# EAGLE board A3DL (2) (EAGLE 9.6.2)
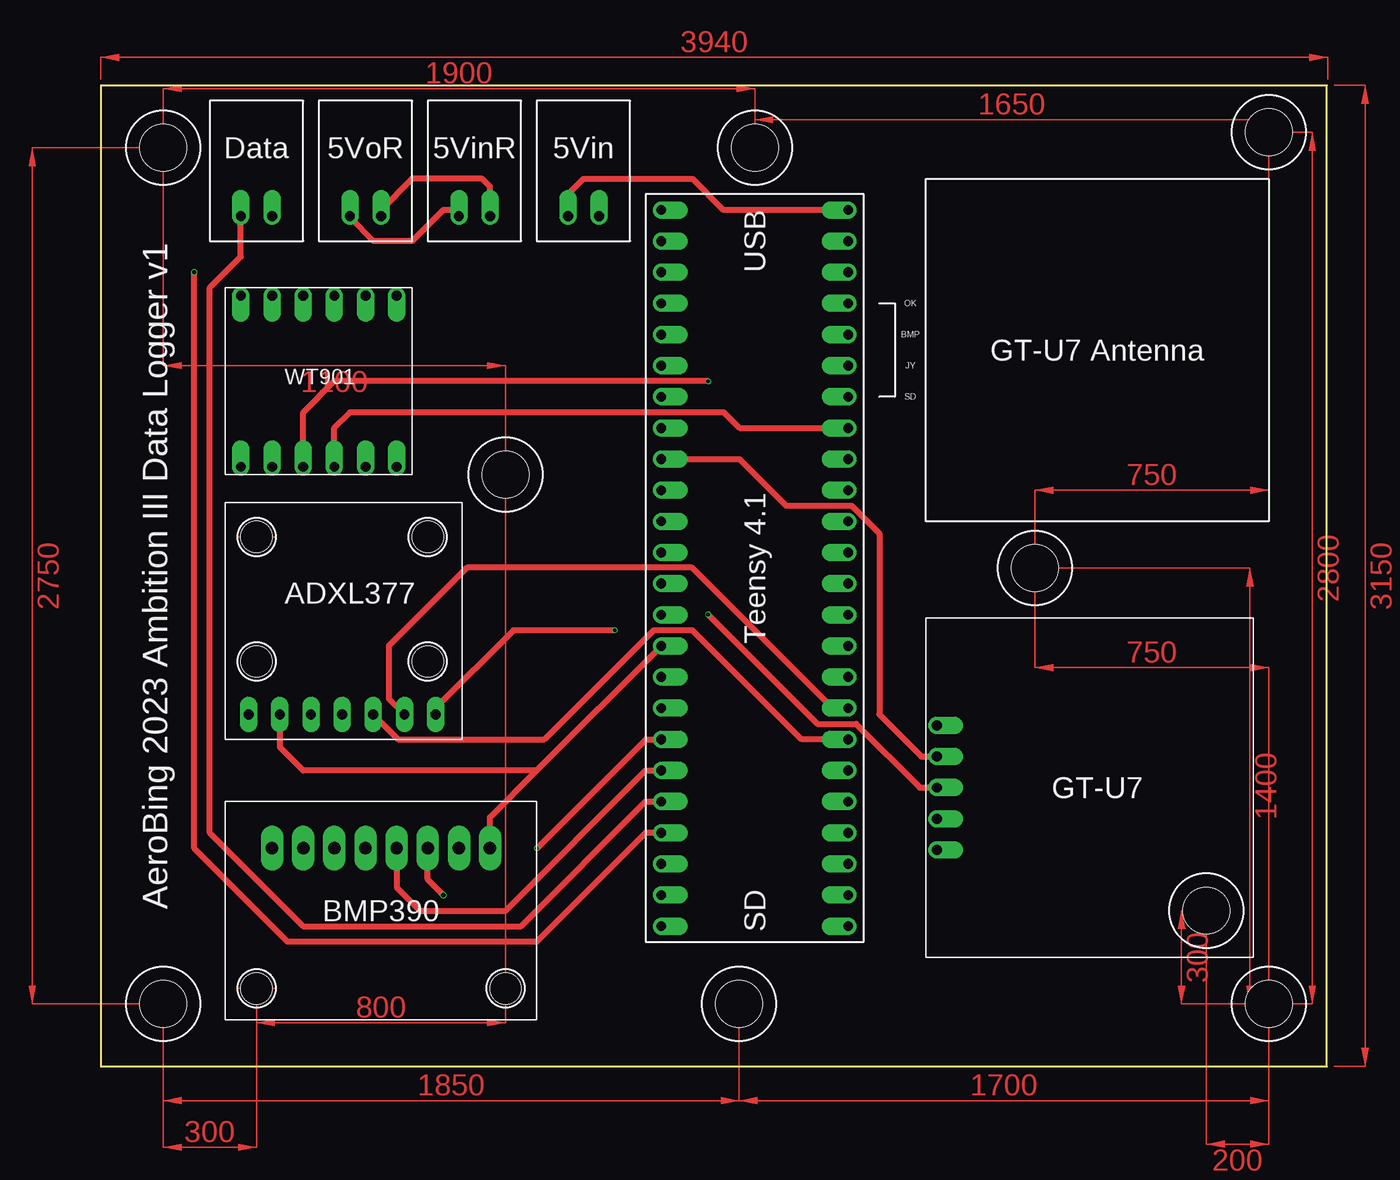
[diagram p0: board, top side]
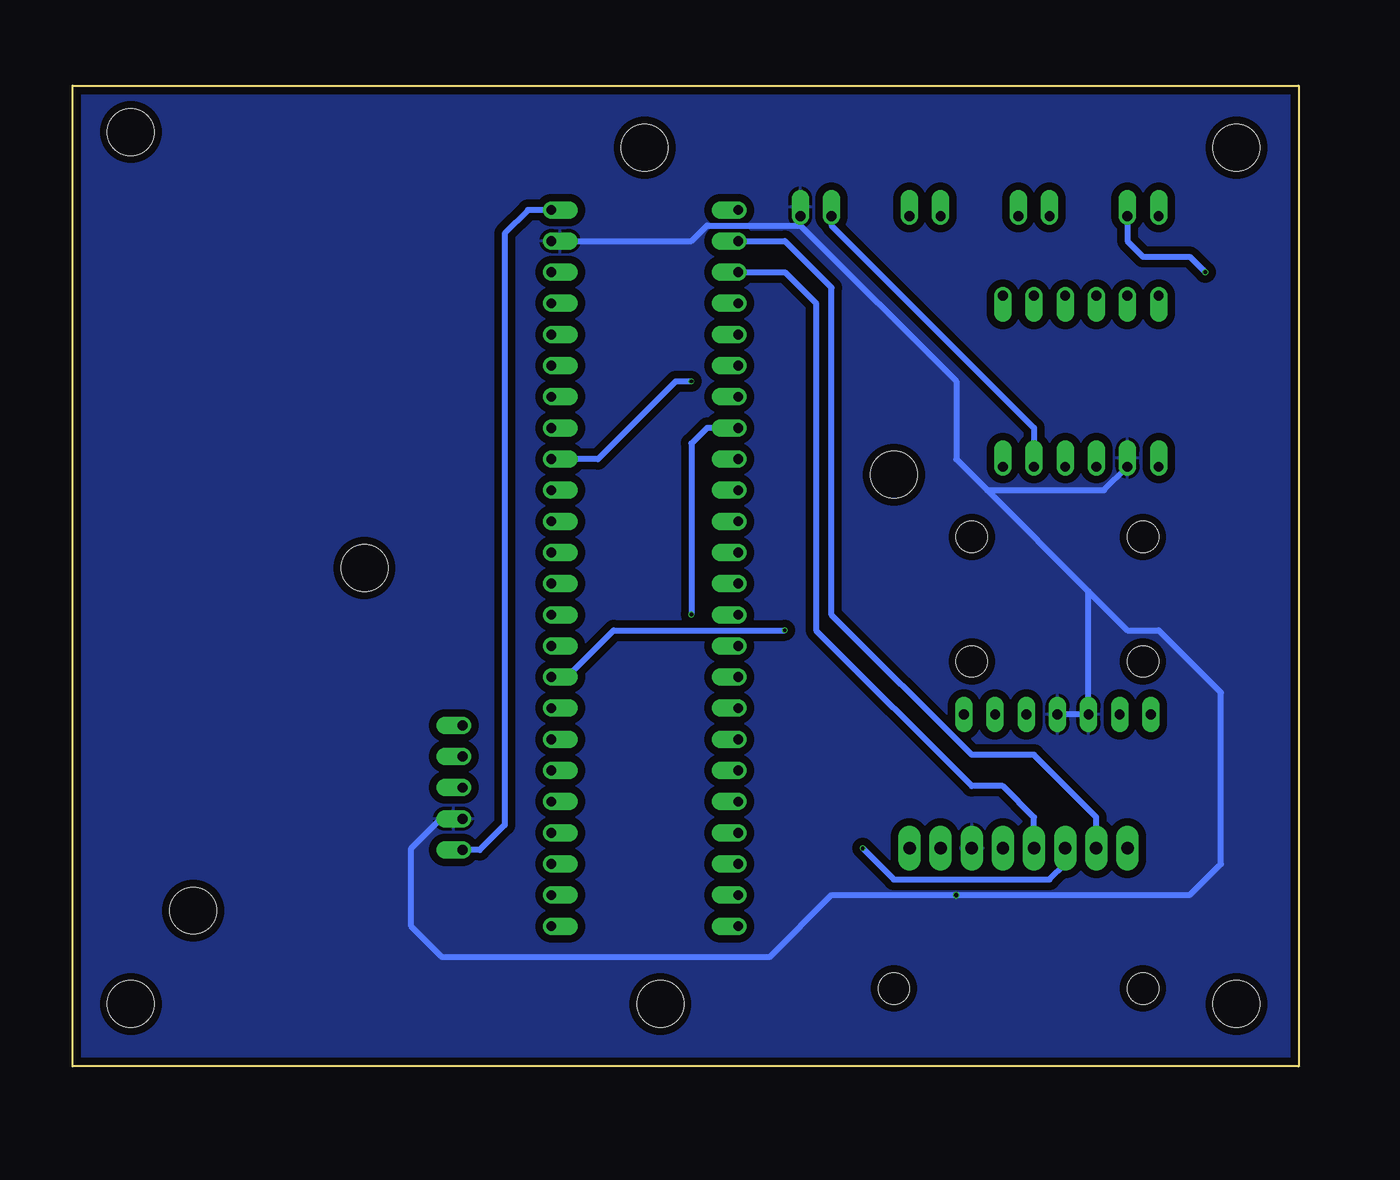
[diagram p1: board, bottom side, seen from below]

Size 100 x 80 mm. Coordinates in mm from the lower left corner, seen from the top.
Outline: 0,0 100,0 100,80 0,80 0,0
Copper layers (1*16): Top 0.035mm / dielectric 1.6mm / Bottom 0.035mm
Design rules "JLPCB-TwoLayer *": minimum track width 20mil, minimum drill 0.3mm, track to track 5mil, track to pad 5mil, pad to pad 5mil, via to via 5mil, smd to smd 5mil, copper to edge 0.2mm, drill to drill 6mil, minimum pad ring 10mil, minimum via ring 3mil, stop-mask expansion 4mil, vias tented up to drill 0mil, thermal gap 10mil
Holes 3.81 mm at 5.08,74.93 5.08,5.08 95.25,76.2 95.25,5.08 33.02,48.26 52.07,5.08 76.2,40.64 53.34,74.93

## Footprints (pad centres in the part's own frame; a part is rotated, then mirrored left to right if it is on the bottom)
ADXL377 = drill 0.8 long: 3V 4.445,2.032; GND 6.985,2.032; T 9.525,2.032; VIN 1.905,2.032; X 17.145,2.032; Y 14.605,2.032; Z 12.065,2.032 | hole 2.54: 2.54,16.51; 16.51,16.51; 16.51,6.35; 2.54,6.35
GT-U7 = drill 0.8 pad 1.27 offset: GND 11.303,25.781; RX 13.843,25.781; TX 16.383,25.781; U 18.923,25.781; VCC 8.763,25.781 | hole 3.81: 3.81,3.81
CUSTOM_RADIO_INTERFACE = drill 0.8 offset: 5V 5.08,9.398; GND 2.54,9.398; RX 13.97,9.398; TX 11.43,9.398
WT901 = drill 0.8 offset: D0 13.97,14.605; D1 1.27,14.605; D2 13.97,0.635; D3 1.27,0.635; GND1 3.81,14.605; GND2 3.81,0.635; RX 8.89,14.605; SCL 8.89,0.635; SDA 6.35,0.635; TX 6.35,14.605; VCC1 11.43,14.605; VCC2 11.43,0.635
BMP390 = drill 1.016 long: 3V0 6.35,3.81; CS 19.05,3.81; GND 8.89,3.81; INT 21.59,3.81; SCL 11.43,3.81; SDA 16.51,3.81; SDC 13.97,3.81; VIN 3.81,3.81 | hole 2.54: 2.54,15.24; 22.86,15.24
CUSTOM_POWER_INPUT = drill 0.8 offset: 5V 5.08,9.398; GND 2.54,9.398; RFD_5V 13.97,9.398; RFD_GND 11.43,9.398
CUSTOM_TEENSY4.1 = drill 0.8 offset: 0 3.81,1.27; 1 6.35,1.27; 2 8.89,1.27; 3 11.43,1.27; 3VA 36.83,1.27; 3VB 6.35,16.51; 4 13.97,1.27; 5 16.51,1.27; 5VA 1.27,16.51; 6 19.05,1.27; 7 21.59,1.27; 8 24.13,1.27; 9 26.67,1.27; 10 29.21,1.27; 11 31.75,1.27; 12 34.29,1.27; 13 34.29,16.51; 14 31.75,16.51; 15 29.21,16.51; 16 26.67,16.51; 17 24.13,16.51; 18 21.59,16.51; 19 19.05,16.51; 20 16.51,16.51; 21 13.97,16.51; 22 11.43,16.51; 23 8.89,16.51; 24 39.37,1.27; 25 41.91,1.27; 26 44.45,1.27; 27 46.99,1.27; 28 49.53,1.27; 29 52.07,1.27; 30 54.61,1.27; 31 57.15,1.27; 32 59.69,1.27; 33 59.69,16.51; 34 57.15,16.51; 35 54.61,16.51; 36 52.07,16.51; 37 49.53,16.51; 38 46.99,16.51; 39 44.45,16.51; 40 41.91,16.51; 41 39.37,16.51; GNDA 1.27,1.27; GNDB 3.81,16.51; GNDC 36.83,16.51

## Placement (x,y rotation side)
U$1  ADXL377  [ADXL377]  10.16,26.67 0 top
U$2  GT-U7  [GT-U7]  93.98,8.89 90 top
U$3  CUSTOM_RADIO_INTERFACE  [CUSTOM_RADIO_INTERFACE]  25.4,78.74 180 top
U$4  WT901  [WT901]  10.16,48.26 0 top
U$5  BMP390  [BMP390]  35.56,21.59 180 top
U$6  CUSTOM_GT-U7_ANTENNA  [CUSTOM_GT-U7_ANTENNA]  67.31,44.45 0 top
U$7  CUSTOM_POWER_INPUT  [CUSTOM_POWER_INPUT]  43.18,78.74 180 top
U$8  CUSTOM_TEENSY4.1  [CUSTOM_TEENSY4.1]  44.45,71.12 270 top

## Library data of the parts
U$1 = CUSTOM ADXL377
U$2 = CUSTOM GT-U7
U$3 = CUSTOM RADIO INTERFACE
U$4 = CUSTOM WT901
U$5 = CUSTOM BMP390; SPICEPREFIX: X
U$6 = CUSTOM GT-U7 ANTENNA
U$7 = CUSTOM POWER SUPPLY
U$8 = CUSTOM TEENSY4.1

## Nets
3V: U$1.3V U$5.VIN U$8.3VA
5V: U$2.VCC U$4.VCC2 U$7.5V U$8.5VA
ADXL377_X: U$1.X U$8.41
ADXL377_Y: U$1.Y U$8.40
ADXL377_Z: U$1.Z U$8.39
BMP_CS: U$5.CS U$8.0
BMP_SCL: U$5.SCL U$8.27
BMP_SDA: U$5.SDA U$8.26
BMP_SDO: U$5.SDC U$8.1
GND: U$1.GND U$1.T U$2.GND U$4.GND2 U$5.GND U$7.GND U$8.GNDB
GTU7_RX: U$2.RX U$8.6
GTU7_TX: U$2.TX U$8.7
RFD_5V: U$3.5V U$7.RFD_5V
RFD_GND: U$3.GND U$7.RFD_GND
RFD_RX: U$3.RX U$8.28
RFD_TX: U$3.TX U$8.29
WT901_SCL: U$4.SCL U$8.19
WT901_SDA: U$4.SDA U$8.18

## Tracks (layer width: path | path; a pad name or v marks a point on that pad's centre or on a via)
3V
  Top 0.508: 35.56,24.13 16.51,24.13 14.61,26.04 U$1.3V | 35.56,24.13 U$8.3VA | 35.56,24.13 31.75,20.32 U$5.VIN
5V
  Top 0.508: U$8.5VA 50.8,69.85 48.26,72.39 39.37,72.39 38.1,71.12 U$7.5V
  Bottom 0.508: U$4.VCC2 21.59,52.07 38.1,68.58 U$7.5V | U$8.5VA 62.87,69.85 64.77,67.94 64.77,19.68 66.8,17.65 U$2.VCC
ADXL377_X  (via drill 0.3)
  Top 0.508: v41.91,35.56 33.66,35.56 27.3,29.21 U$1.X
  Bottom 0.508: U$8.41 59.69,31.75 55.88,35.56 v41.91,35.56
ADXL377_Y
  Top 0.508: U$8.40 59.69,29.21 48.23,40.66 29.87,40.66 23.5,34.29 23.5,29.97 U$1.Y
ADXL377_Z
  Top 0.508: U$8.39 57.15,26.67 48.26,35.56 45.09,35.56 36.2,26.67 24.26,26.67 U$1.Z
BMP_CS
  Bottom 0.508: U$5.CS 16.51,20.32 21.59,25.4 26.67,25.4 38.1,36.83 38.1,63.5 41.91,67.31 U$8.0
BMP_SCL
  Top 0.508: U$8.27 44.45,24.13 33.02,12.7 26.04,12.7 24.13,14.61 U$5.SCL
BMP_SDA  (via drill 0.3)
  Top 0.508: U$8.26 44.48,26.67 35.59,17.78 v35.56,17.78
  Bottom 0.508: v35.56,17.78 33.02,15.24 20.32,15.24 19.05,16.51 U$5.SDA
BMP_SDO
  Bottom 0.508: U$8.1 41.91,64.77 39.37,62.23 39.37,35.56 26.67,22.86 24.13,22.86 21.59,20.32 U$5.SDC
GND  (via drill 0.35)
  Top 0.508: v27.94,13.97 26.67,15.24 U$5.GND
  Bottom 0.508: 25.4,46.99 27.94,49.53 27.94,55.88 40.64,68.58 | 25.4,46.99 15.88,46.99 U$4.GND2 | U$1.T U$1.GND 17.14,38.73 | 25.4,46.99 17.14,38.73 | 17.14,38.73 13.97,35.56 11.43,35.56 6.35,30.48 6.35,16.51 8.89,13.97 v27.94,13.97 38.1,13.97 43.18,8.89 69.85,8.89 72.39,11.43 72.39,17.78 69.85,20.32 68.33,20.32 U$2.GND | U$8.GNDB 49.53,67.31 48.26,68.58 40.64,68.58 | U$7.GND 40.64,68.58
  pour Bottom (isolate 0.61): 0,0 100,0 100,80.01 0,80.01
GTU7_RX  (via drill 0.3)
  Top 0.508: v49.53,36.85 58.45,27.94 61.59,27.94 66.8,22.73 U$2.RX
  Bottom 0.508: v49.53,36.85 49.53,50.8 48.26,52.07 U$8.6
GTU7_TX
  Top 0.508: U$2.TX 66.93,25.27 63.5,28.7 63.5,43.47 61.24,45.73 55.9,45.73 52.09,49.53 U$8.7
RFD_5V
  Top 0.508: U$3.5V 20.32,69.22 22.23,67.31 25.4,67.31 27.94,69.85 29.21,69.85 U$7.RFD_5V
RFD_GND
  Top 0.508: U$7.RFD_GND 31.75,71.75 31.11,72.39 25.4,72.39 22.86,69.85 U$3.GND
RFD_RX
  Top 0.508: U$8.28 44.45,21.59 34.29,11.43 16.51,11.43 8.89,19.05 8.89,63.5 10.16,64.77 11.43,66.04 U$3.RX
RFD_TX  (via drill 0.35)
  Top 0.508: U$8.29 44.45,19.05 35.56,10.16 15.24,10.16 7.62,17.78 v7.62,64.77
  Bottom 0.508: U$3.TX 13.97,67.31 12.7,66.04 8.89,66.04 v7.62,64.77
WT901_SCL
  Top 0.508: U$4.SCL 19.05,52.07 20.32,53.34 50.83,53.34 52.09,52.07 U$8.19
WT901_SDA  (via drill 0.3)
  Top 0.508: v49.53,55.88 19.05,55.88 16.51,53.34 U$4.SDA
  Bottom 0.508: v49.53,55.88 50.8,55.88 57.15,49.53 U$8.18
(copper drawn outside any net)
  shapes: Top area x21

## Text on the board
tPlace: OK | BMP | JY | SD
tNames: AeroBing 2023 Ambition III Data Logger v1